# Altium PCB gps-tag-lora-addon.PcbDoc (part 3 of 3)
Units mm, origin at the board's own origin, x right, y up, seen from the top; angles counter-clockwise.
Board outline 60 x 35 mm, 2 copper layers (Top Layer, Bottom Layer); 76 components, 64 nets, 296 pads, 200 vias.
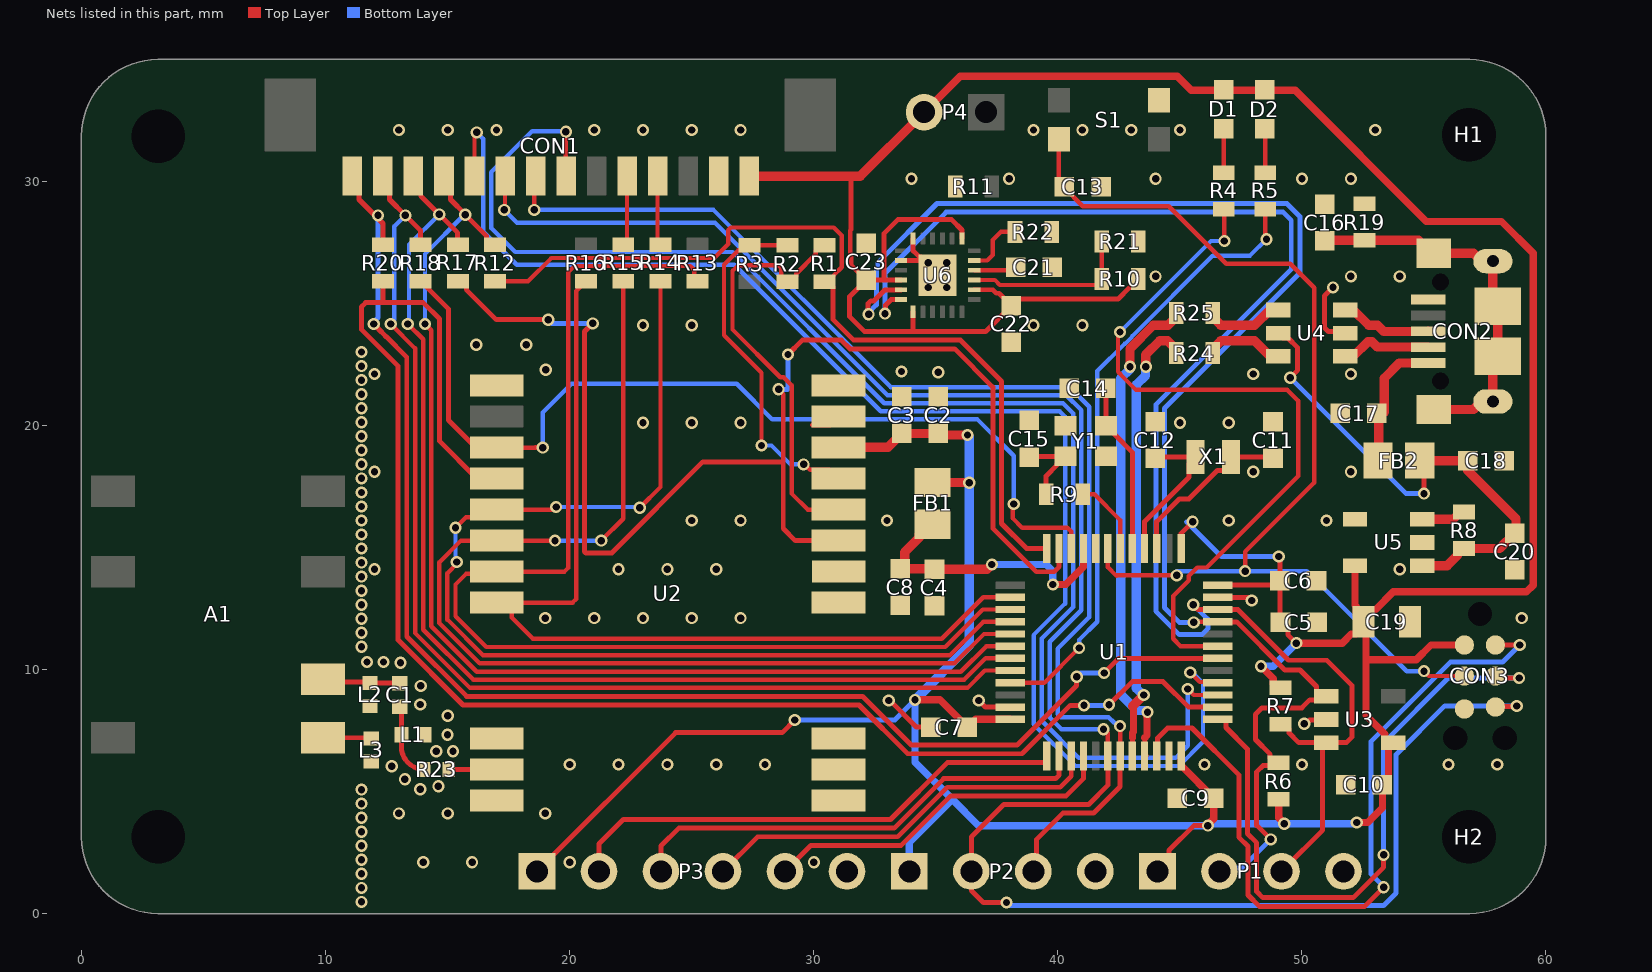
[diagram p2: the nets of this part, all layers, seen from the top]

## Via types
v1: diameter 0.5, hole 0.3, Top Layer to Bottom Layer, tented both sides, 196 vias
v2: diameter 0.5, hole 0.3, Top Layer to Bottom Layer, tented bottom, 4 vias

## Nets (pads, with @x,y where several pads share a name; then routed paths per layer and width w, separated by ;. In a path a pad name is that pad's centre, name@x,y a point inside that pad or via, vN(x,y) a via of type N, cw(c..) or ccw(c..) an arc to the next point about the centre after c; other vN are vias at no path point) (continued)
GND: C2.1 C3.1 C4.1 C5.1 C6.1 C7.1 C8.1 C9.1 C10.1 C11.1 C12.1 C13.1 C14.1 C15.1 C16.2 C17.1 C18.1 C19.1 C20.1 C21.1 C22.1 C23.1 CON1.2 CON2.5 CON3.5 H1.1 H2.1 L1.1 L2.1 L3.1 P1.4 P2.4 P3.6 R11.2 R19.1 R21.1 R22.2 S1.2 U1.8 U1.23 U1.35 U1.47 U2.1 U2.2 U2.3 U2.4 U2.5 U2.10 U2.11 U2.12 U2.20 U2.22 U3.2 U4.2 U5.2 U5.4 U6.18 U6.20 U6.25 Y1.2 Y1.4 | length 12.5
  Top Layer w0.203: U2.10@29.948,20.007 30.672,20.007 U2.10@31.02,20.355 ; v1(33.075,8.725) 33.1,8.75 34.214,7.636 34.789,7.636 C7.1@34.8,7.625 ; U6.20@33.575,26.75 34.475,26.75 34.63,26.595 34.63,26.675 34.407,26.898 34.327,26.898 34.079,27.146 34.079,27.44 34.077,27.442 34.077,27.648 U6.18@34.075,27.65 ; v1(36.766,8.725) 37.039,8.452 U1.23@38.054,8.452 ; U1.47@46.554,12.952 47.835,12.952 47.962,12.825 v1(47.95,12.825) ; v1(50.1,7.775) 50.167,7.775 50.314,7.922 50.972,7.922 U3.2@51,7.95 ; v1(51.275,25.65) 50.925,25.3 50.925,24 51.089,23.836 51.714,23.836 U4.2@51.775,23.775
  other v1: 11.475,0.475 11.475,1.05 11.475,1.625 14.008,2.1 16.008,2.1 20.008,2.1 30.008,2.1 11.475,2.2 11.475,2.775 11.475,3.35 11.475,3.925 13.008,4.1 15.008,4.1 19.008,4.1 11.475,4.5 11.475,5.075 13.883,5.086 14.626,5.212 13.254,5.502 12.718,6.032 20.008,6.1 22.008,6.1 24.008,6.1 26.008,6.1 28.008,6.1 46.008,6.1 50.008,6.1 56.008,6.1 58.008,6.1 14.541,6.645 15.225,6.65 15,7.325 15.008,8.1 13.884,8.563 13.9,9.325 13.075,10.275 11.7,10.3 12.375,10.3 11.475,10.925 11.475,11.5 11.475,12.075 19.008,12.1 21.008,12.1 23.008,12.1 25.008,12.1 27.008,12.1 59.008,12.1 11.475,12.65 11.475,13.225 11.475,13.8 12.008,14.1 22.008,14.1 24.008,14.1 26.008,14.1 54.008,14.1 11.475,14.375 11.475,14.95 11.475,15.525 11.475,16.1 25.008,16.1 27.008,16.1 33.008,16.1 47.008,16.1 51.008,16.1 11.475,16.675 11.475,17.25 11.475,17.825 12.008,18.1 48.008,18.1 52.008,18.1 11.475,18.4 11.475,18.975 11.475,19.55 23.008,20.1 25.008,20.1 27.008,20.1 45.008,20.1 47.008,20.1 11.475,20.125 11.475,20.7 11.475,21.275 11.475,21.85 12.008,22.1 48.008,22.1 52.008,22.1 35.1,22.175 33.6,22.2 19.025,22.275 11.475,22.425 11.475,23 16.175,23.3 18.225,23.3 23.008,24.1 25.008,24.1 39.008,24.1 41.008,24.1 44.008,26.1 52.008,26.1 54.008,26.1 34.008,30.1 38.008,30.1 44.008,30.1 50.008,30.1 52.008,30.1 13.008,32.1 15.008,32.1 17.008,32.1 21.008,32.1 23.008,32.1 25.008,32.1 27.008,32.1 39.008,32.1 41.008,32.1 43.008,32.1 45.008,32.1 53.008,32.1
  other v2: 34.694,25.642 35.456,25.642 34.694,26.658 35.456,26.658
I2C1_SCL: P1.2 R6.1 U1.45 U3.1 U6.23 | length 61.8
  Top Layer w0.203: v1(32.252,24.551) 32.252,24.573 32.225,24.6 32.225,24.981 32.344,25.1 32.473,25.1 32.923,25.55 U6.23@33.575,25.55 ; v1(45.573,11.925) 45.6,11.952 U1.45@46.554,11.952 46.557,11.949 47.326,11.949 49.3,9.975 49.925,9.975 50.602,9.298 50.602,9.098 50.8,8.9 U3.1@51,8.9 50.85,8.75 50.325,8.75 50,8.425 48.367,8.425 48.1,8.158 48.1,7.125 48.702,6.523 48.702,6.373 48.9,6.175 R6.1@49.05,6.175 48.939,6.064 48.414,6.064 48.15,5.8 48.15,3.61 v1(48.725,3.035)
  Bottom Layer w0.203: v1(32.252,24.551) 32.252,24.614 32.569,24.932 32.569,26.372 32.625,26.428 32.625,26.658 35.052,29.085 49.382,29.085 49.921,28.546 49.921,26.243 44.373,20.695 44.373,12.53 44.979,11.925 v1(45.573,11.925) ; P1.2@46.625,1.725 46.771,1.871 47.561,1.871 v1(48.725,3.035)
I2C1_SDA: P1.3 R7.1 U1.46 U3.3 U6.24 | length 62.1
  Top Layer w0.203: v1(32.925,24.575) 32.952,24.602 32.952,24.927 33.175,25.15 U6.24@33.575,25.15 ; v1(45.55,12.65) 45.748,12.452 U1.46@46.554,12.452 47.375,12.452 49.452,10.375 51.025,10.375 52.05,9.35 52.05,7.225 51.825,7 U3.3@51,7 ; R7.1@49.125,7.75 49.275,7.75 49.473,7.552 49.473,7.402 49.875,7 U3.3@51,7 ; P1.3@49.201,1.976 49.306,1.872 49.306,1.866 50.85,3.41 50.85,6.85 U3.3@51,7
  Bottom Layer w0.203: v1(32.925,24.575) 32.925,26.225 35.429,28.729 49.235,28.729 49.565,28.399 49.565,26.39 44.018,20.843 44.018,12.383 44.98,11.421 45.902,11.421 46.15,11.669 46.15,12.061 45.561,12.65 v1(45.55,12.65)
LED1: R4.2 U1.43 | length 30.7
  Top Layer w0.178: v1(42.55,23.825) 42.465,23.74 42.465,22.197 42.554,22.107 42.554,22.1 43.204,21.45 49.4,21.45 49.85,21 49.85,17.924 46.099,14.173 45.717,14.173 45.368,13.825 45.368,13.647 44.729,13.007 44.729,11.254 45.03,10.952 U1.43@46.554,10.952 ; R4.2@46.8,28.85 46.825,28.825 v1(46.825,27.55)
  Bottom Layer w0.178: v1(42.55,23.825) 46.275,27.55 v1(46.825,27.55)
LED2: R5.2 U1.21 | length 25.5
  Top Layer w0.178: U1.21@38.054,9.452 39.452,9.452 v1(40.875,10.875) ; R5.2@48.5,28.85 48.5,27.675 v1(48.55,27.625)
  Bottom Layer w0.178: v1(40.875,10.875) 40.875,11.208 41.621,11.954 41.621,22.221 42.734,23.334 42.754,23.334 43.041,23.621 43.041,23.641 46.35,26.95 47.875,26.95 v1(48.55,27.625)
LORA_BUSY: R18.2 U1.10 U2.14 | length 38.8
  Top Layer w0.178: U2.14@17.02,19.085 18.6,19.085 ; v1(38.2,16.775) 38.15,16.725 38.15,16.196 38.54,15.806 40.394,15.806 40.554,15.646 U1.10@40.554,14.952
  Top Layer w0.203: R18.2@13.9,25.9 15.033,24.767 15.033,20.217 16.165,19.085 U2.14@17.02,19.085 ; 18.6,19.085 v1(18.9,19.085)
  Bottom Layer w0.178: v1(18.9,19.085) 18.9,20.525 20.075,21.7 26.85,21.7 28.308,20.242 36.708,20.242 38.2,18.75 v1(38.2,16.775)
LORA_RST: R20.2 U1.38 U2.15 | length 63.8
  Top Layer w0.203: R20.2@12.356,25.9 12.356,25.025 ; U2.15@17.02,17.815 16.21,17.815 14.677,19.348 14.677,24.352 14.005,25.025 12.356,25.025 ; v1(41.075,8.525) 40.518,8.525 38.537,6.544 33.853,6.544 31.854,8.543 15.635,8.543 12.976,11.202 12.976,22.424 11.471,23.929 11.471,24.846 11.65,25.025 12.356,25.025 ; v1(42.102,8.55) 43.052,9.5 44.312,9.5 45.36,8.452 U1.38@46.554,8.452
  Bottom Layer w0.203: v1(41.075,8.525) 42.077,8.525 v1(42.102,8.55)
MCU_IO1: CON1.11 R12.1 U1.18 | length 46.4
  Top Layer w0.178: v1(14.075,24.15) 14.334,23.891 14.334,11.765 16.197,9.902 36.027,9.902 37.077,10.952 U1.18@38.054,10.952
  Top Layer w0.203: CON1.11@14.856,30.208 15.12,29.944 15.12,29.248 15.725,28.643 v1(15.725,28.625) ; v1(15.725,28.625) 16.602,27.748 16.602,27.598 16.8,27.4 R12.1@16.95,27.4
  Bottom Layer w0.178: v1(14.075,24.15) 14.075,27.014 15.686,28.625 v1(15.725,28.625)
MCU_IO2: CON1.12 R17.1 U1.19 | length 46.6
  Top Layer w0.178: v1(13.375,24.15) 14.004,23.521 14.004,11.628 16.061,9.571 36.163,9.571 37.044,10.452 U1.19@38.054,10.452
  Top Layer w0.203: CON1.12@13.606,30.208 13.904,29.91 13.904,29.396 15.414,27.886 15.414,27.411 R17.1@15.425,27.4
  Bottom Layer w0.178: v1(13.375,24.15) 13.425,24.2 13.425,27.406 v1(14.659,28.641)
MCU_IO3: CON1.13 R18.1 U1.20 | length 46.9
  Top Layer w0.178: v1(12.675,24.15) 13.674,23.151 13.674,11.491 15.924,9.241 36.3,9.241 37.011,9.952 U1.20@38.054,9.952
  Top Layer w0.203: CON1.13@12.356,30.208 12.624,29.94 12.624,29.251 v1(13.275,28.6) 13.9,27.975 R18.1@13.9,27.4
  Bottom Layer w0.178: v1(12.675,24.15) 12.65,24.15 12.825,24.325 12.825,28.15 v1(13.275,28.6)
MCU_IO4: CON1.14 R20.1 U1.42 | length 58
  Top Layer w0.203: CON1.14@11.106,30.208 11.374,29.94 11.374,29.251 12.356,28.269 R20.1@12.356,27.4 ; v1(11.975,24.15) 12.171,23.954 12.171,23.941 12.466,23.646 12.479,23.646 13.331,22.794 13.331,11.349 15.782,8.898 32.002,8.898 34,6.9 38.335,6.9 40.766,9.331 40.766,9.691 v1(40.775,9.7) ; v1(41.9,9.85) 41.91,9.85 41.91,9.86 42.502,10.452 U1.42@46.554,10.452
  Bottom Layer w0.203: v1(11.975,24.15) 11.975,24.23 12.15,24.405 v1(12.15,28.6) ; v1(40.775,9.7) 40.925,9.85 v1(41.9,9.85)
MISO: CON1.4 R14.1 | length 2.9
  Top Layer w0.178: CON1.4@23.606,30.208 23.606,27.519 R14.1@23.725,27.4
MOSI: CON1.5 R15.1 | length 2.9
  Top Layer w0.178: R15.1@22.2,27.4 22.356,27.556 CON1.5@22.356,30.208
NetA1_1: A1.1 L3.2 | length 2
  Top Layer w0.203: A1.1@9.9,7.2 11.845,7.2 cw(c11.845,7.17) L3.2@11.875,7.17
NetA1_2: A1.2 C1.2 L2.2 | length 3.3
  Top Layer w0.203: A1.2@9.875,9.475 L2.2@11.645,9.475 ; L2.2@11.67,9.6 cw(c11.67,9.445) L2.2@11.825,9.445 13.05,9.445 C1.2@13.05,9.432
NetC1_1: C1.1 L1.2 R23.2 | length 3.1
  Top Layer w0.203: C1.1@13.05,8.472 cw(c13.05,8.412) 13.11,8.412 L1.2@13.11,7.325 13.11,6.84 ccw(c14.05,6.84) R23.2@14.05,5.9
NetC4_2: C4.2 C8.2 FB1.1 U1.9 | length 11.8
  Top Layer w0.3: v1(39.8,13.475) 40.329,13.475 41.054,14.2 U1.9@41.054,14.952
  Top Layer w0.381: FB1.1@34.875,15.945 34.735,15.945 34.331,15.54 34.331,15.401 33.726,14.796 33.726,14.301 C8.2@33.55,14.125 34.925,14.125 C4.2@34.95,14.1 37.1,14.1 v1(37.3,14.3)
  Bottom Layer w0.3: v1(37.3,14.3) 39.525,14.3 39.8,14.025 v1(39.8,13.475)
NetC14_2: C14.2 U1.5 Y1.1 | length 7
  Top Layer w0.203: C14.2@41.975,21.525 Y1.1@41.975,19.975 42.025,19.975 42.323,19.677 42.323,19.627 43.054,18.896 U1.5@43.054,14.952
NetC15_2: C15.2 R9.2 Y1.3 | length 3.4
  Top Layer w0.203: C15.2@38.825,18.7 38.85,18.725 Y1.3@40.275,18.725 ; R9.2@39.525,17.175 39.525,17.925 39.977,18.377 39.977,18.427 Y1.3@40.275,18.725 ; Y1.3@40.325,18.725 Y1.3@40.275,18.725
NetC16_1: C16.1 CON2.6 CON2.7 CON2.8 CON2.9 CON2.10 CON2.11 R19.2 | length 15.7
  Top Layer w0.178: C16.1@50.937,27.55 C16.1@50.949,27.538
  Top Layer w0.381: C16.1@50.937,27.55 50.962,27.575 R19.2@52.575,27.575 54.775,27.575 55.3,27.05 CON2.7@55.4,27.05 57.032,27.05 57.357,26.725 CON2.9@57.825,26.725 57.825,25.075 CON2.11@58.025,24.875 CON2.10@58.025,22.825 57.825,22.625 CON2.8@57.825,20.975 57.357,20.975 57.032,20.65 CON2.6@55.4,20.65
NetC17_2: C17.2 CON2.1 FB2.1 | length 5.4
  Top Layer w0.381: FB2.1@53.12,18.55 53.15,18.58 C17.2@53.15,20.5 ; C17.2@53.371,20.532 53.371,21.927 53.994,22.55 CON2.1@55.175,22.55
NetC21_2: C21.2 U6.10 | length 1.8
  Top Layer w0.178: U6.10@36.575,26.35 38.15,26.35 C21.2@38.275,26.475
NetD1_1: D1.1 R4.1 | length 1.7
  Top Layer w0.178: R4.1@46.8,30.35 D1.1@46.8,32.09
NetD2_1: D2.1 R5.1 | length 1.8
  Top Layer w0.178: R5.1@48.5,30.35 D2.1@48.5,32.102
NetR1_2: R1.2 R2.2 U2.7 | length 17.5
  Top Layer w0.178: R1.2@30.45,27.375 30.3,27.375 30.089,27.164 30.089,27.014 29.286,26.211 29.286,26.086 29.075,25.875 R2.2@28.925,25.875 28.886,25.875 28.675,26.086 28.675,26.446 28.571,26.55 26.9,26.55 26.675,26.325 26.675,23.925 28.634,21.966 28.768,21.966 29.097,21.638 29.097,17.203 29.755,16.545 U2.7@31.02,16.545
NetR2_1: R2.1 R3.2 U2.8 | length 14.7
  Top Layer w0.178: v1(27.865,19.175) 27.865,22.151 26.325,23.691 26.325,26.575 26.914,27.164 27.164,27.164 R3.2@27.375,27.375 R2.1@28.925,27.375 ; v1(29.588,18.398) 29.632,18.398 29.853,18.176 30.659,18.176 U2.8@31.02,17.815
  Bottom Layer w0.178: v1(27.865,19.175) 28.275,19.175 29.052,18.398 v1(29.588,18.398)
NetR8_1: R8.1 U5.3 | length 1.8
  Top Layer w0.381: U5.3@54.925,16.15 56.2,16.15 56.5,16.45 R8.1@56.65,16.45
NetR9_1: R9.1 U1.6 | length 3.1
  Top Layer w0.178: R9.1@41.025,17.175 41.5,17.175 42.554,16.121 U1.6@42.554,14.952
NetR10_2: R10.2 R21.2 U6.9 | length 7
  Top Layer w0.178: U6.9@36.575,25.95 37.425,25.95 37.625,25.75 41.589,25.75 41.8,25.961 R10.2@41.8,26 R21.2@41.8,27.538
NetR22_1: R22.1 U6.11 | length 2.5
  Top Layer w0.178: U6.11@36.575,26.75 37.115,26.75 37.34,26.975 37.34,27.59 37.675,27.925 R22.1@38.25,27.925
NetR23_1: R23.1 U2.21 | length 2
  Top Layer w0.203: R23.1@15.05,5.9 17.02,5.9 U2.21@17.02,5.895
NRST: C13.2 CON3.3 S1.3 U1.7 | length 44.3
  Top Layer w0.178: S1.3@40.043,31.72 40.043,30.007 C13.2@40.275,29.775 40.25,29.75 41.025,28.975 44.549,28.975 46.903,26.621 49.52,26.621 50.51,25.632 50.51,17.651 47.675,14.815 v1(47.675,14.025) ; U1.7@42.054,14.952 42.054,14.181 42.41,13.825 42.436,13.851 v1(44.877,13.851) ; v1(55,9.928) 55.198,9.73 CON3.3@56.659,9.73
  Bottom Layer w0.178: v1(44.877,13.851) 44.877,14.023 44.875,14.025 v1(47.675,14.025) 50.2,14.025 54.297,9.928 v1(55,9.928)
OSC32_IN: C11.2 U1.3 X1.2 | length 7.1
  Top Layer w0.203: U1.3@44.054,14.952 44.054,16.051 44.989,16.986 45.376,16.986 46.543,18.153 46.82,18.153 47.093,18.427 X1.2@47.093,18.703 48.755,18.703 C11.2@48.818,18.641
OSC32_OUT: C12.2 U1.4 X1.1 | length 6.3
  Top Layer w0.203: U1.4@43.554,14.952 43.554,16.054 45.373,17.873 45.373,18.433 X1.1@45.643,18.703 44.054,18.703 C12.2@43.992,18.64
RXEN: R17.2 U1.11 U2.6 | length 55.1
  Top Layer w0.203: R17.2@15.425,25.9 15.575,25.9 15.773,25.702 15.773,25.552 17,24.325 v1(19.125,24.325) ; v1(20.95,24.175) 20.614,23.839 20.614,14.831 20.675,14.771 21.734,14.771 25.463,18.5 28.754,18.5 ; v1@28.55,21.475 28.754,21.271 28.754,18.5 ; v1(28.95,22.9) 29.535,23.485 31.134,23.485 31.49,23.13 35.773,23.13 37.34,21.562 37.34,15.778 39.118,14 39.85,14 40.054,14.204 U1.11@40.054,14.952 ; U2.6@31.02,15.275 29.249,15.275 28.754,15.77 28.754,18.5
  Bottom Layer w0.203: v1(19.125,24.325) 19.275,24.175 v1(20.95,24.175) ; v1(28.565,21.475) 28.925,21.475 28.95,21.5 v1(28.95,22.9)
SPI1_MISO: R14.2 U1.16 U2.16 | length 45.7
  Top Layer w0.178: v1(15.325,15.8) 15.759,16.234 16.709,16.234 U2.16@17.02,16.545 19.345,16.545 v1(19.45,16.65) ; v1(15.375,14.4) 15.414,14.361 14.995,13.941 14.995,12.038 16.453,10.58 35.58,10.58 36.952,11.952 U1.16@38.054,11.952 ; v1(22.875,16.625) 23.725,17.475 R14.2@23.725,25.9
  Bottom Layer w0.178: v1(15.325,15.8) 15.325,14.45 v1(15.375,14.4) ; v1(19.45,16.65) 22.85,16.65 v1(22.875,16.625)
SPI1_MOSI: R15.2 U1.17 U2.17 | length 45.1
  Top Layer w0.178: U2.17@17.02,15.275 15.555,15.275 14.665,14.384 14.665,11.901 16.316,10.25 35.775,10.25 36.977,11.452 U1.17@38.054,11.452 ; U2.17@17.02,15.275 v1(19.401,15.276) ; v1(21.3,15.275) 22.2,16.175 R15.2@22.2,25.9
  Bottom Layer w0.178: v1@19.401,15.275 v1(21.3,15.275)
SPI1_NSS: R16.2 U1.14 U2.19 | length 38.7
  Top Layer w0.178: U2.19@17.02,12.735 U2.19@17.271,12.735 ; R16.2@20.675,25.9 20.67,25.9 20.271,25.502 20.271,12.883 20.124,12.735 U2.19@17.271,12.735 ; U1.14@38.054,12.952 36.946,12.952 35.251,11.257 18.498,11.257 17.633,12.122 17.633,12.374 U2.19@17.271,12.735
SPI1_SCK: R13.2 U1.15 U2.18 | length 48.1
  Top Layer w0.178: R13.2@25.25,25.9 25.112,26.038 25.112,26.363 24.95,26.525 20.2,26.525 19.941,26.266 19.941,14.153 19.794,14.005 U2.18@17.02,14.005 16.927,13.912 15.757,13.912 15.325,13.48 15.325,12.175 16.586,10.914 35.393,10.914 36.931,12.452 U1.15@38.054,12.452
SPI2_MISO: P3.4 U1.27 | length 16.7
  Top Layer w0.2: P3.4@26.285,1.725 27.704,3.144 33.443,3.144 35.472,5.173 40.098,5.173 40.554,5.629 U1.27@40.554,6.452
SPI2_MOSI: P3.5 U1.28 | length 14.7
  Top Layer w0.2: P3.5@28.825,1.725 29.891,2.791 33.589,2.791 35.618,4.82 40.345,4.82 41.05,5.525 41.05,6.448 U1.28@41.054,6.452
SPI2_NSS: P3.2 U1.25 | length 21.1
  Top Layer w0.203: P3.2@21.205,1.725 21.205,2.855 22.2,3.85 33.15,3.85 35.489,6.189 39.506,6.189 39.554,6.237 U1.25@39.554,6.452
SPI2_SCK: P3.3 U1.26 | length 19.3
  Top Layer w0.2: P3.3@23.745,1.725 23.745,2.77 24.471,3.496 33.297,3.496 35.326,5.525 39.908,5.525 40.054,5.671 U1.26@40.054,6.452
SWCLK: CON3.4 U1.37 | length 26.5
  Top Layer w0.203: U1.37@46.554,7.952 46.841,7.952 46.89,7.904 46.89,7.616 47.775,6.731 47.775,3.272 48.15,2.897 48.15,0.903 48.402,0.651 52.101,0.651 53.35,1.9 v1(53.35,2.4) ; CON3.4@57.929,9.73 58.01,9.649 v1(58.9,9.649)
  Bottom Layer w0.203: v1(53.35,2.4) 53.35,7 55.999,9.649 v1(58.9,9.649)
SWDIO: CON3.2 U1.34 | length 31.1
  Top Layer w0.203: U1.34@44.054,6.452 44.09,6.488 44.09,7.19 44.5,7.6 45.5,7.6 47.419,5.681 47.419,3.125 47.794,2.75 47.794,0.756 48.255,0.295 52.57,0.295 v1(53.35,1.075) ; CON3.2@57.929,11 v1(58.925,11)
  Bottom Layer w0.203: v1(53.35,1.075) 53.35,1.1 52.825,1.625 52.825,7.04 56.082,10.297 58.222,10.297 v1(58.925,11)
TXEN: R1.1 R12.2 U1.12 | length 35.4
  Top Layer w0.178: R12.2@16.95,25.9 18.3,25.9 19.255,26.855 25.93,26.855 26.5,27.425 26.5,27.996 26.604,28.1 30.825,28.1 31.15,27.775 31.15,26.475 30.811,26.136 30.811,26.086 R1.1@30.6,25.875
  Top Layer w0.203: R1.1@30.6,25.875 30.798,25.677 30.798,24.324 31.637,23.485 36.015,23.485 37.696,21.804 37.696,15.979 38.723,14.952 U1.12@39.554,14.952
USART1_CTS: CON1.10 U1.40 | length 58.6
  Top Layer w0.178: CON1.10@16.106,30.208 16.106,31.906 v1(16.2,32) ; v1(45.425,9.875) 45.815,9.485 46.521,9.485 U1.40@46.554,9.452
  Bottom Layer w0.178: v1(16.2,32) 16.466,31.734 16.466,27.942 17.833,26.575 26.749,26.575 32.752,20.572 40.077,20.572 40.3,20.349 40.3,12.694 39.009,11.404 39.009,7.757 40.721,6.045 44.962,6.045 45.95,7.033 45.95,9.437 45.512,9.875 v1(45.425,9.875)
USART1_RTS: CON1.7 U1.39 | length 58.5
  Top Layer w0.178: v1(19.85,32.025) 19.85,30.214 CON1.7@19.856,30.208 ; v1(45.325,9.2) 45.573,8.952 U1.39@46.554,8.952
  Bottom Layer w0.178: v1(19.85,32.025) 19.825,32.05 18.475,32.05 16.796,30.371 16.796,28.078 17.775,27.1 26.691,27.1 32.888,20.903 40.213,20.903 40.63,20.486 40.63,12.558 39.34,11.267 39.34,7.893 40.858,6.375 44.825,6.375 45.325,6.875 v1(45.325,9.2)
USART1_RX: CON1.8 P2.3 U1.31 | length 51.3
  Top Layer w0.178: v1(18.55,28.825) 18.55,30.152 CON1.8@18.606,30.208 ; v1(42.55,7.677) 42.554,7.673 U1.31@42.554,6.452
  Top Layer w0.203: P2.3@39.135,1.922 39.135,3.035 40.211,4.111 41.463,4.111 42.554,5.201 U1.31@42.554,6.452
  Bottom Layer w0.178: v1(18.55,28.825) 25.9,28.825 33.162,21.563 40.487,21.563 41.291,20.759 41.291,12.141 40,10.85 40,8.167 40.133,8.034 41.307,8.034 41.315,8.042 42.081,8.042 42.31,7.812 42.328,7.812 42.463,7.677 v1(42.55,7.677)
USART1_TX: CON1.9 CON3.6 P2.2 U1.30 | length 85.2
  Top Layer w0.178: v1(17.325,28.825) 17.356,28.856 CON1.9@17.356,30.208 ; v1(41.877,7.55) 41.911,7.55 42.054,7.407 U1.30@42.054,6.452
  Top Layer w0.203: v1(37.902,0.45) 36.951,0.45 36.46,0.941 P2.2@36.46,1.725 36.46,3.135 37.791,4.466 41.266,4.466 42.054,5.254 U1.30@42.054,6.452 ; CON3.6@57.929,8.46 57.951,8.482 58.781,8.482 v1(58.803,8.503)
  Bottom Layer w0.178: v1(17.325,28.825) 17.85,28.3 25.958,28.3 33.025,21.233 40.35,21.233 40.96,20.623 40.96,12.421 39.67,11.13 39.67,8.03 40.15,7.55 v1(41.877,7.55)
  Bottom Layer w0.203: v1(37.902,0.45) 38.027,0.325 53.35,0.325 53.854,0.829 53.854,6.504 55.853,8.503 v1(58.803,8.503)
USB_A_N: R24.1 U4.6 | length 3.3
  Top Layer w0.381: R24.1@46.35,22.955 46.459,23.064 46.459,23.24 46.683,23.463 47.112,23.463 47.117,23.457 48.058,23.457 48.69,22.825 U4.6@49.025,22.825
USB_A_P: R25.1 U4.4 | length 3.3
  Top Layer w0.381: R25.1@46.35,24.606 46.459,24.496 46.459,24.321 46.683,24.098 47.375,24.098 47.381,24.092 48.058,24.092 48.69,24.725 U4.4@49.025,24.725
USB_CON_N: CON2.2 U4.1 | length 3.7
  Top Layer w0.381: U4.1@51.775,22.825 52.11,22.825 52.71,23.425 52.869,23.425 53.087,23.207 55.167,23.207 CON2.2@55.175,23.2
USB_CON_P: CON2.3 U4.3 | length 3.8
  Top Layer w0.381: U4.3@51.775,24.725 52.11,24.725 52.742,24.092 53.1,24.092 53.35,23.842 55.167,23.842 CON2.3@55.175,23.85
USB_N: R24.2 U1.32 | length 18.8
  Top Layer w0.2: U1.32@43.054,6.452 43.061,6.459 43.061,7.194
  Top Layer w0.3: 43.061,7.194 43.061,7.407 43.102,7.448 43.102,8.445 43.061,8.486
  Top Layer w0.381: 43.061,8.486 v1(43.525,8.95) ; v1@43.6,22.409 v1(43.609,22.4) 43.609,22.895 44.176,23.463 44.492,23.463 44.74,23.214 44.74,23.064 R24.2@44.85,22.955
  Bottom Layer w0.381: v1(43.525,8.95) 43.503,8.95 43.221,9.233 43.221,21.662 43.591,22.033 43.591,22.383 v1(43.609,22.4)
USB_P: R25.2 U1.33 | length 20.2
  Top Layer w0.2: U1.33@43.561,6.459 43.561,7.194
  Top Layer w0.3: U1.33@43.554,6.452 U1.33@43.561,6.459 ; 43.561,7.194 43.656,7.289 v1@43.656,8.145
  Top Layer w0.381: v1@42.965,22.409 v1(42.956,22.4) 42.956,23.141 43.913,24.098 44.517,24.098 44.74,24.321 44.74,24.496 R25.2@44.85,24.606 ; v1@43.656,8.145 43.668,8.158 43.668,8.195 v1@43.7,8.227
  Bottom Layer w0.381: v1(42.956,22.4) 42.956,22.296 42.586,21.925 42.586,8.97 43.24,8.315 43.58,8.315 43.645,8.25 v1(43.677,8.25)
USB_V: C18.2 C20.2 FB2.2 R8.2 U4.5 U5.1 | length 21.5
  Top Layer w0.2: U4.5@49.025,23.775 49.225,23.575 49.432,23.575 49.825,23.182 49.825,22.255 v1(49.52,21.95) ; FB2.2@54.83,18.55 55,18.38 v1(55,17.2)
  Top Layer w0.381: FB2.2@54.83,18.55 C18.2@56.8,18.55 56.8,18.146 58.775,16.171 58.775,15.625 C20.2@58.725,15.575 58.1,14.95 R8.2@56.65,14.95 56.5,14.95 56.39,14.84 56.39,14.69 55.95,14.25 U5.1@54.925,14.25
  Bottom Layer w0.2: v1(49.52,21.95) 54.27,17.2 v1(55,17.2)
VCC: C2.2 C3.2 C5.2 C6.2 C7.2 C9.2 C10.2 C19.2 C22.2 C23.2 CON1.1 CON3.1 D1.2 D2.2 FB1.2 P1.1 P2.1 P3.1 P4.2 R6.2 R7.2 R10.1 U1.1 U1.24 U1.36 U1.48 U2.9 U3.4 U5.5 U6.1 U6.8 U6.13 U6.22 | length 197.2
  Top Layer w0.2: P3.1@18.665,1.725 24.347,7.407 28.707,7.407 v1(29.225,7.925) ; 31.525,30.208 31.525,28.009 31.498,27.982 31.498,26.945 31.525,26.918 31.525,26.575 C23.2@32.15,25.95 ; U6.22@33.575,25.95 33.366,25.95 32.875,25.95 ; U6.1@34.075,24.65 34.075,23.841 34.077,23.839 ; U6.13@36.075,27.65 36.075,28 35.65,28.425 33.45,28.425 32.875,27.85 32.875,25.95 ; U6.8@36.575,25.55 37.342,25.55 37.484,25.409 37.591,25.409 C22.2@38.1,24.9 ; R10.1@43.3,26 43.3,25.85 43.1,25.65 42.95,25.65 42.475,25.175 38.375,25.175 C22.2@38.1,24.9 ; P1.1@44.085,1.725 44.554,2.194 44.554,2.58 45.574,3.6 v1(46.15,3.6) ; U1.1@45.054,14.952 45.054,15.579 v1(45.525,16.05) ; U1.48@46.554,13.452 48.922,13.452 C6.2@49.1,13.63 ; v1(49.05,14.625) 49.1,14.575 C6.2@49.1,13.63 ; v1(49.775,11.075) 49.425,11.425 49.425,11.625 C5.2@49.125,11.925 49.1,11.95 C6.2@49.1,13.63 ; C23.2@32.15,25.95 31.475,25.275 31.475,24.452 32.088,23.839 34.077,23.839 ; C23.2@32.15,25.95 32.875,25.95 ; 34.077,23.839 37.039,23.839 C22.2@38.1,24.9
  Top Layer w0.3: v1(34.15,8.75) 35.175,8.75 C7.2@36.3,7.625 36.627,7.952 U1.24@38.054,7.952 ; P4.2@34.362,32.662 P4.2@34.525,32.825 36,34.3 44.9,34.3 45.475,33.725 49.725,33.725 55.1,28.35 58.175,28.35 59.477,27.048 59.477,13.452 59.2,13.175 53.75,13.175 53.025,12.45 52.825,12.45 52.525,12.15 C19.2@52.525,11.95 ; U1.36@45.054,6.452 45.054,6.002 45.116,6.002 C9.2@46.393,4.725 46.393,3.875 46.15,3.632 v1(46.15,3.6) ; v1(48.325,10.125) 48.825,9.625 48.825,9.4 48.975,9.25 R7.2@49.125,9.25 ; R6.2@49.05,4.675 49.05,3.925 49.275,3.7 v1(49.275,3.675) ; v1(49.775,11.075) 51.65,11.075 52.025,11.45 52.225,11.45 C19.2@52.525,11.75 ; U5.5@52.175,14.25 52.175,12.626 52.225,12.576 52.225,12.25 C19.2@52.525,11.95 ; v1(52.25,3.725) 52.699,3.725 53.3,4.326 C10.2@53.3,5.275 53.55,5.525 U3.4@53.55,7 ; U3.4@53.75,7 U3.4@53.55,7 ; CON3.1@56.659,11 55.291,11 54.691,10.4 52.629,10.4 ; C19.2@52.525,11.75 52.629,11.646 52.629,10.4 ; C19.2@52.525,11.75 C19.2@52.525,11.95 ; 52.629,10.4 52.629,8.121 53.4,7.35 53.4,7.15 U3.4@53.55,7
  Top Layer w0.381: CON1.1@27.356,30.208 31.525,30.208 31.908,30.208 P4.2@34.362,32.662 ; U2.9@31.02,19.085 31.035,19.1 33.046,19.1 C3.2@33.613,19.667 C2.2@35.113,19.667 35.18,19.6 v1(36.3,19.6) ; FB1.2@34.875,17.655 36.321,17.655 36.326,17.65 v1(36.375,17.65)
  Bottom Layer w0.2: v1(29.225,7.925) 33.325,7.925 v1(34.15,8.75) ; v1(45.525,16.05) 45.275,16.05 46.7,14.625 v1(49.05,14.625)
  Bottom Layer w0.3: P2.1@33.92,1.725 33.92,2.92 35.675,4.675 ; v1(34.15,8.75) 34.15,6.2 35.675,4.675 ; v1(48.325,10.125) 48.825,10.125 v1(49.775,11.075) ; v1(52.25,3.725) 52.2,3.675 v1(49.275,3.675) 46.225,3.675 v1(46.15,3.6) 36.75,3.6 35.675,4.675
  Bottom Layer w0.381: v1(34.15,8.75) 36.375,10.975 v1(36.375,17.65) 36.375,19.525 v1(36.3,19.6)
pads on no net: A1.3 A1.4 A1.5 A1.6 A1.7 CON1. CON2. CON2.4 CON3.0 H3.1 H4.1 S1.1 S1.4 U1.2 U1.22 U3.5 U6.2 U6.3 U6.4 U6.5 U6.6 U6.7 U6.14 U6.15 U6.16 U6.17 U6.19 U6.21

## Polygon pours and split planes (outlines as drawn)
GND on Top Layer "GND_TOP" (solid, pour order 2): 0,3.116 0,31.866 cw(c3.15,31.841) 3.125,34.991 56.875,34.991 cw(c56.85,31.841) 60,31.866 60,3.116 cw(c56.85,3.141) 56.875,-0.009 3.125,-0.009 cw(c3.15,3.141)
GND on Bottom Layer "GND_BOT" (solid, pour order 3): 0,3.116 0,31.866 cw(c3.15,31.841) 3.125,34.991 56.875,34.991 cw(c56.85,31.841) 60,31.866 60,3.116 cw(c56.85,3.141) 56.875,-0.009 3.125,-0.009 cw(c3.15,3.141)

## Keep-outs
Keep-Out Layer:
  lines w0.1: 0,3.116 ccw(c3.15,3.141) 3.125,-0.009 ; 0,3.116 0,31.866 0,31.866 cw(c3.15,31.841) 3.125,34.991 ; 3.125,-0.009 3.125,-0.009 ; 3.125,-0.009 56.875,-0.009 ; 3.125,34.991 56.875,34.991 ; 3.125,34.991 3.125,34.991 ; 56.875,-0.009 ccw(c56.85,3.141) 60,3.116 ; 56.875,-0.009 56.875,-0.009 ; 56.875,34.991 cw(c56.85,31.841) 60,31.866 ; 56.875,34.991 56.875,34.991 ; 60,3.116 60,3.116 ; 60,3.116 60,31.866 ; 60,31.866 60,31.866

## Other copper
Top Layer:
  pour cut-out: 56.85,3.141
  pour cut-out: 11.175,-0.025 0,-0.025 0,34.975 11.175,34.991
Bottom Layer:
  pour cut-out: 11.175,-0.025 0,-0.025 0,34.975 11.175,34.991

## Silkscreen, mask and mechanical layers (free items; w line width, h text height)
Top Overlay:
  circle w0.18: c7.3,22.997 r0.418
  circle w0.3: c7.3,22.997 r0.025
  lines w0.18: 1.83,22.712 cw(c2.475,22.325) 3.135,22.686 ; 2.781,22.686 3.135,22.686 ; 3.135,23.04 3.135,22.686 ; 4.91,23.632 5.264,23.632 ; 5.238,22.327 cw(c5.625,22.972) 5.264,23.632 ; 5.264,23.278 5.264,23.632 ; 6.655,23.738 6.655,23.384 ; 7.009,23.384 6.655,23.384 ; 7.96,23.358 ccw(c7.3,22.997) 6.655,23.384
  lines w0.2: 2.125,23.35 2.475,23.7 ; 2.475,22.325 2.475,23.7 ; 2.825,23.35 2.475,23.7 ; 4.6,22.622 4.25,22.972 ; 4.6,23.322 4.25,22.972 ; 5.625,22.972 4.25,22.972
  text "CTS" at 16.425,31.625 h0.8 r90
  text "TX" at 17.7,31.625 h0.8 r90
  text "RX" at 18.875,31.625 h0.8 r90
  text "RTS" at 20.225,31.625 h0.8 r90
  text "CS" at 21.45,31.625 h0.8 r90
  text "SI" at 22.65,31.6 h0.8 r90
  text "IO4" at 11.5,31.55 h0.8 r90
  text "IO2" at 14.008,31.55 h0.8 r90
  text "IO1" at 15.2,31.55 h0.8 r90
  text "SO" at 23.9,31.55 h0.8 r90
  text "IO3" at 12.775,31.525 h0.8 r90
  text "CLK" at 25.15,31.525 h0.8 r90
  text "GND" at 26.45,31.525 h0.8 r90
  text "VCC" at 27.725,31.525 h0.8 r90
  text "BOOT" at 32.848,31.525 h0.8 r90
  text "IRNAS.EU" at 1.2,27.175 h0.8
  text ".Version" at 1.225,25.775 h0.8
  text "LORA BOARD" at 1.2,24.325 h0.8
  text "Z" at 7.125,21.25 h0.8
  text "X" at 2.125,21.2 h0.8
  text "Y" at 4.675,21.2 h0.8
  text "VCC" at 34.375,3.35 h0.8 r90
  text "GND" at 42.05,3.275 h0.8 r90
  text "SCL" at 37.15,3.2 h0.8 r90
  text "VCC" at 50.675,3.2 h0.8
  text "GND" at 42.825,3.1 h0.8
  text "RX" at 45.825,3.1 h0.8
  text "TX" at 48.35,3.116 h0.8
  text "SDA" at 39.7,3.075 h0.8 r90
Bottom Overlay:
  lines w0.18: 7.875,34.9 7.875,29.6 30.525,29.6 30.525,34.825
  text "RTS" at 20.275,33.775 h0.8 r90
  text "VCC" at 27.65,33.725 h0.8 r90
  text "CTS" at 16.5,33.7 h0.8 r90
  text "CLK" at 25.075,33.625 h0.8 r90
  text "GND" at 26.433,33.625 h0.8 r90
  text "IO3" at 12.725,33.575 h0.8 r90
  text "IO2" at 14.008,33.525 h0.8 r90
  text "IO1" at 15.125,33.525 h0.8 r90
  text "IO4" at 11.6,33.5 h0.8 r90
  text "TX" at 17.7,33.1 h0.8 r90
  text "RX" at 18.925,33.05 h0.8 r90
  text "CS" at 21.467,33.05 h0.8 r90
  text "SO" at 23.925,32.9 h0.8 r90
  text "SI" at 22.675,32.65 h0.8 r90
  text "VCC IO" at 52.025,11.35 h0.8 r180
  text "RST CLK" at 52.125,10.025 h0.8 r180
  text "GND TX" at 52.15,8.875 h0.8 r180
  text "VCC" at 34.35,5.475 h0.8 r90
  text "SCL" at 37.15,5.4 h0.8 r90
  text "GND" at 42.025,5.4 h0.8 r90
  text "GND" at 44.225,5.4 h0.8 r90
  text "VCC" at 52.15,5.4 h0.8 r90
  text "SDA" at 39.675,5.35 h0.8 r90
  text "VCC" at 18.975,5.175 h0.8 r90
  text "CLK" at 24.175,5.15 h0.8 r90
  text "GND" at 31.675,5.075 h0.8 r90
  text "TX" at 49.534,4.775 h0.8 r90
  text "RX" at 46.85,4.6 h0.8 r90
  text "CS" at 21.6,4.4 h0.8 r90
  text "SO" at 26.675,4.325 h0.8 r90
  text "SI" at 29.2,4.25 h0.8 r90
Mechanical 1:
  lines w0.1: -1.242,-0.009 3.808,-0.009 ; -0.316,34.991 4.475,34.991 ; 0,3.116 ccw(c3.15,3.141) 3.125,-0.009 56.875,-0.009 ccw(c56.85,3.141) 60,3.116 60,31.866 ccw(c56.85,31.841) 56.875,34.991 3.125,34.991 ccw(c3.15,31.841) 0,31.866 ; 0,-0.425 0,5.1 ; 0,3.116 0,31.866 ; 0,30.725 0,34.966
Top Assembly (Mech29):
  text "Assembly TOP" at 14,41.825 h3
Bottom Assembly (Mech30):
  text "Assembly TBOTTOM" at 55.375,41.975 h3

## Dimensions
3.125,34.991 to 3.125,-0.009 on Mechanical 1
0,31.866 to 60,31.866 on Mechanical 1

## Text inside footprints (layer, text, board x,y; h text height)
CON3: Top Overlay "ICSP" at 55.3,6.45 h0.8 r90